# EAGLE board relayboard (EAGLE 6.4)
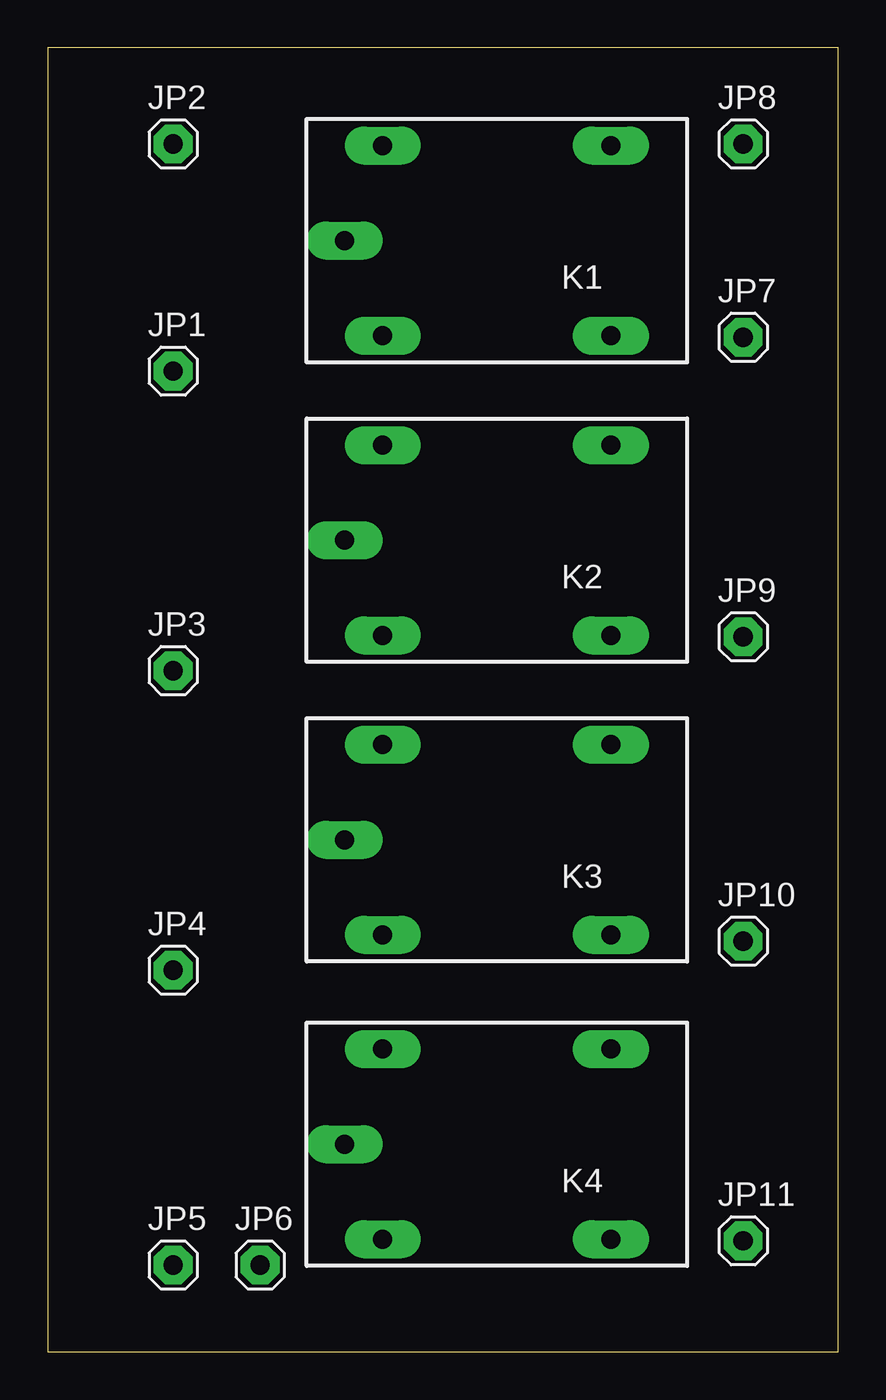
[diagram p0: board, top side]
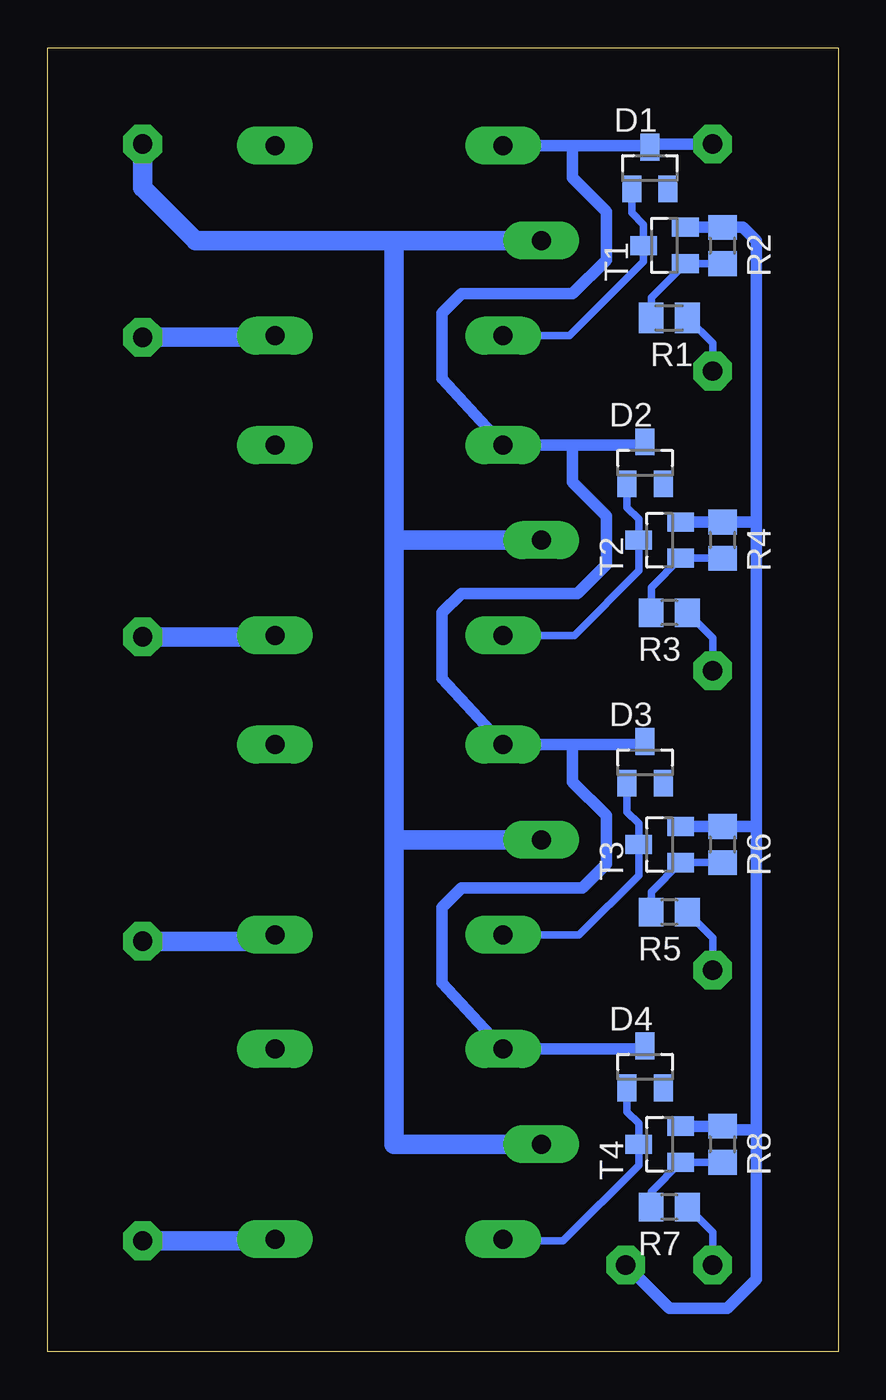
[diagram p1: board, bottom side, seen from below]

Size 41.58 x 68.57 mm. Coordinates in mm from the lower left corner, seen from the top.
Outline: 0,0 41.58,0 41.58,68.57 0,68.57 0,0
Copper layers (1*16): Top 0.035mm / dielectric 1.5mm / Bottom 0.035mm
Design rules "default *": minimum track width 10mil, minimum drill 24mil, track to track 8mil, track to pad 8mil, pad to pad 8mil, via to via 8mil, smd to smd 8mil, copper to edge 40mil, drill to drill 8mil, minimum pad ring 10mil, minimum via ring 8mil, stop-mask expansion 4mil, vias tented up to drill 0mil, thermal gap 10mil
Net classes: 1 power: width 0.8 mm, drill 0.6 mm, clearance 1 mm

## Footprints (pad centres in the part's own frame; a part is rotated, then mirrored left to right if it is on the bottom)
SOT23 = smd 1 x 1.4: 1 -0.95,-1.1; 2 0.95,-1.1; 3 0,1.1
1X01 = drill 1.016 octagon: 1 0,0
CQ1 = drill 1 long: 1 6,-5; 2 6,5; C 8,0; NC -6,-5; NO -6,5
M0805 = smd 1.3 x 1.6: 1 -0.95,0; 2 0.95,0
R0805 = smd 1.3 x 1.5: 1 -0.95,0; 2 0.95,0

## Placement (x,y rotation side)
D1  BAS16  [SOT23]  9.91,62.23 0 bottom
D2  BAS16  [SOT23]  10.16,46.74 0 bottom
D3  BAS16  [SOT23]  10.16,30.99 0 bottom
D4  BAS16  [SOT23]  10.16,14.99 0 bottom
JP1  [1X01]  6.6,51.56 0 top
JP2  [1X01]  6.6,63.5 0 top
JP3  [1X01]  6.6,35.81 0 top
JP4  [1X01]  6.6,20.07 0 top
JP5  [1X01]  6.6,4.57 0 top
JP6  [1X01]  11.18,4.57 0 top
JP7  [1X01]  36.58,53.34 0 top
JP8  [1X01]  36.58,63.5 0 top
JP9  [1X01]  36.58,37.59 0 top
JP10  [1X01]  36.58,21.59 0 top
JP11  [1X01]  36.58,5.84 0 top
K1  812H-1C-C  [CQ1]  23.62,58.42 180 top
K2  812H-1C-C  [CQ1]  23.62,42.67 180 top
K3  812H-1C-C  [CQ1]  23.62,26.92 180 top
K4  812H-1C-C  [CQ1]  23.62,10.92 180 top
R1  10k  [M0805]  8.89,54.36 180 bottom
R2  10k  [R0805]  6.1,58.17 270 bottom
R3  10k  [R0805]  8.89,38.86 180 bottom
R4  10k  [R0805]  6.1,42.67 270 bottom
R5  10k  [R0805]  8.89,23.11 180 bottom
R6  10k  [R0805]  6.1,26.67 270 bottom
R7  10k  [R0805]  8.89,7.62 180 bottom
R8  10k  [R0805]  6.1,10.92 270 bottom
T1  IRLML2402  [SOT23]  9.14,58.17 90 bottom
T2  IRLML2402  [SOT23]  9.4,42.67 90 bottom
T3  IRLML2402  [SOT23]  9.4,26.67 90 bottom
T4  IRLML2402  [SOT23]  9.4,10.92 90 bottom

## Library data of the parts
D1-D4 K1-K4 T1-T4 = ElLin
JP1-JP11 = pinhead
R1-R8 = rcl

## Nets
CH1: JP1.1 R1.1
CH2: JP3.1 R3.1
CH3: JP4.1 R5.1
CH4: JP5.1 R7.1
GND: JP6.1 R2.1 R4.1 R6.1 R8.1 T1.2 T2.2 T3.2 T4.2
N$1: D1.1 K1.2 T1.3
N$2: D2.1 K2.2 T2.3
N$3: R1.2 R2.2 T1.1
N$4: R3.2 R4.2 T2.1
N$5: D3.1 K3.2 T3.3
N$6: R5.2 R6.2 T3.1
N$7: D4.1 K4.2 T4.3
N$8: R7.2 R8.2 T4.1
N$10 [power]: JP8.1 K1.C K2.C K3.C K4.C
N$11 [power]: JP7.1 K1.NO
N$12 [power]: JP9.1 K2.NO
N$13 [power]: JP10.1 K3.NO
N$14 [power]: JP11.1 K4.NO
VCC: D1.3 D2.3 D3.3 D4.3 JP2.1 K1.1 K2.1 K3.1 K4.1

## Tracks (layer width: path | path; a pad name or v marks a point on that pad's centre or on a via)
CH1
  Bottom 0.406: R1.1 6.6,53.02 JP1.1
CH2
  Bottom 0.406: R3.1 6.6,37.53 JP3.1
CH3
  Bottom 0.406: R5.1 6.6,21.78 JP4.1
CH4
  Bottom 0.406: R7.1 6.6,6.28 JP5.1
GND
  Bottom 0.406: 4.51,27.62 4.32,27.43 | R8.1 5.91,11.68
  Bottom 0.61: T1.2 R2.1 5.01,59.12 4.32,58.42 4.32,43.62 | T2.2 R4.1 4.32,43.62 | T3.2 R6.1 4.51,27.62 | 4.32,11.68 4.32,3.81 5.84,2.29 8.89,2.29 JP6.1 | 4.32,11.68 4.32,27.43 4.32,43.62 | R8.1 T4.2 | 5.91,11.68 4.32,11.68
N$1
  Bottom 0.406: D1.1 10.86,59.88 10.24,59.27 T1.3 10.24,57.32 14.14,53.42 K1.2
N$2
  Bottom 0.406: D2.1 11.11,44.38 10.5,43.77 T2.3 10.5,41.06 13.89,37.67 K2.2
N$3
  Bottom 0.406: R2.2 T1.1 9.84,55.42 R1.2
N$4
  Bottom 0.406: R4.2 T2.1 9.84,40.18 R3.2
N$5
  Bottom 0.406: D3.1 11.11,28.38 10.5,27.77 T3.3 10.5,25.06 13.64,21.92 K3.2
N$6
  Bottom 0.406: R6.2 T3.1 9.84,24.18 R5.2
N$7
  Bottom 0.406: D4.1 11.11,12.63 10.5,12.02 T4.3 10.5,9.82 14.48,5.84 17.26,5.84 K4.2
N$8
  Bottom 0.406: R7.2 9.84,8.43 T4.1 R8.2
N$10
  Bottom 1.016: JP8.1 36.58,61.21 33.78,58.42 23.37,58.42 | 23.37,58.42 K1.C | K2.C 23.37,42.67 | 23.37,42.67 23.37,58.42 | K3.C 23.37,26.92 | 23.37,26.92 23.37,42.67 | K4.C 23.37,10.92 23.37,26.92
N$11
  Bottom 1.016: K1.NO 29.45,53.34 JP7.1
N$12
  Bottom 1.016: K2.NO 29.45,37.59 JP9.1
N$13
  Bottom 1.016: K3.NO 29.7,21.59 JP10.1
N$14
  Bottom 1.016: K4.NO 29.45,5.84 JP11.1
VCC
  Bottom 0.406: D1.3 9.74,63.5
  Bottom 0.61: 10.07,47.67 D2.3 | 9.74,63.5 JP2.1 | D1.3 10,63.42 13.97,63.42 | 13.97,63.42 K1.1 | 13.97,63.42 13.97,61.72 12.19,59.94 12.19,57.4 13.97,55.63 19.81,55.63 20.83,54.61 20.83,51.16 K2.1 13.97,47.67 | 10.32,47.67 arc-90 D2.3 | 13.97,47.67 13.97,45.72 12.19,43.94 12.19,41.4 13.72,39.88 19.81,39.88 20.83,38.86 20.83,35.41 K3.1 13.97,31.92 | 13.97,47.67 10.32,47.67 | 10.32,47.67 arc-90 D2.3 | 13.97,31.92 10.32,31.92 D3.3 | 13.97,31.92 13.97,29.97 12.19,28.19 12.19,25.65 13.46,24.38 19.81,24.38 20.83,23.37 20.83,19.41 K4.1 10.25,15.92 arc90 D4.3